# EAGLE board Transponder (EAGLE 9.5.1)
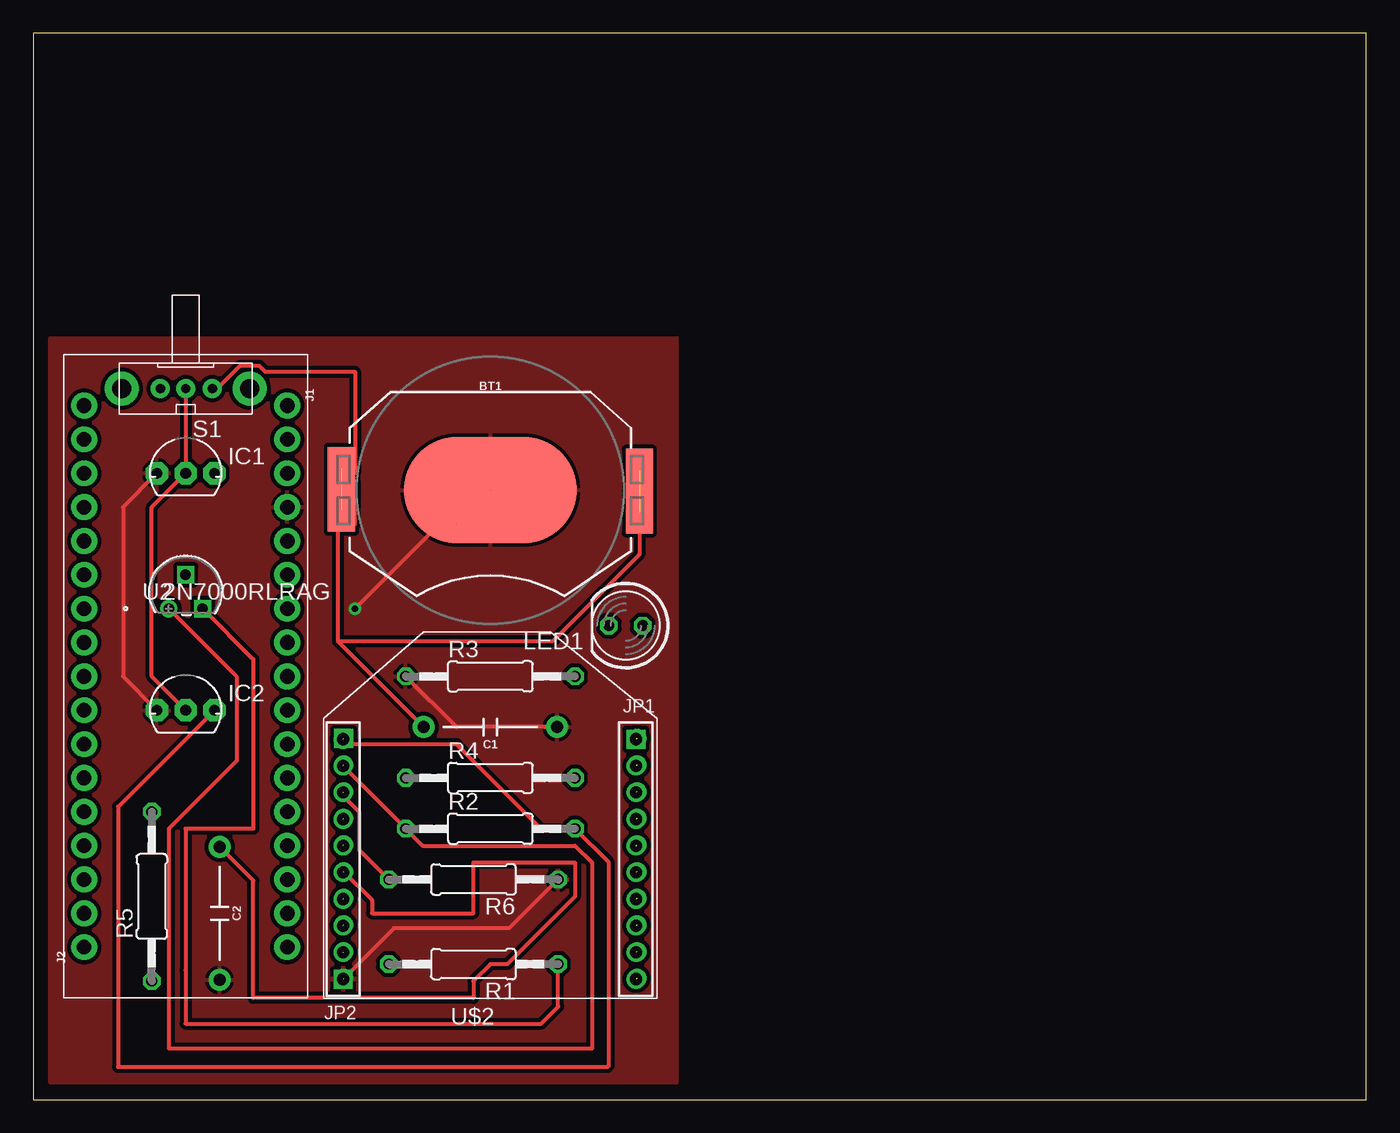
[diagram p0: board, top side]
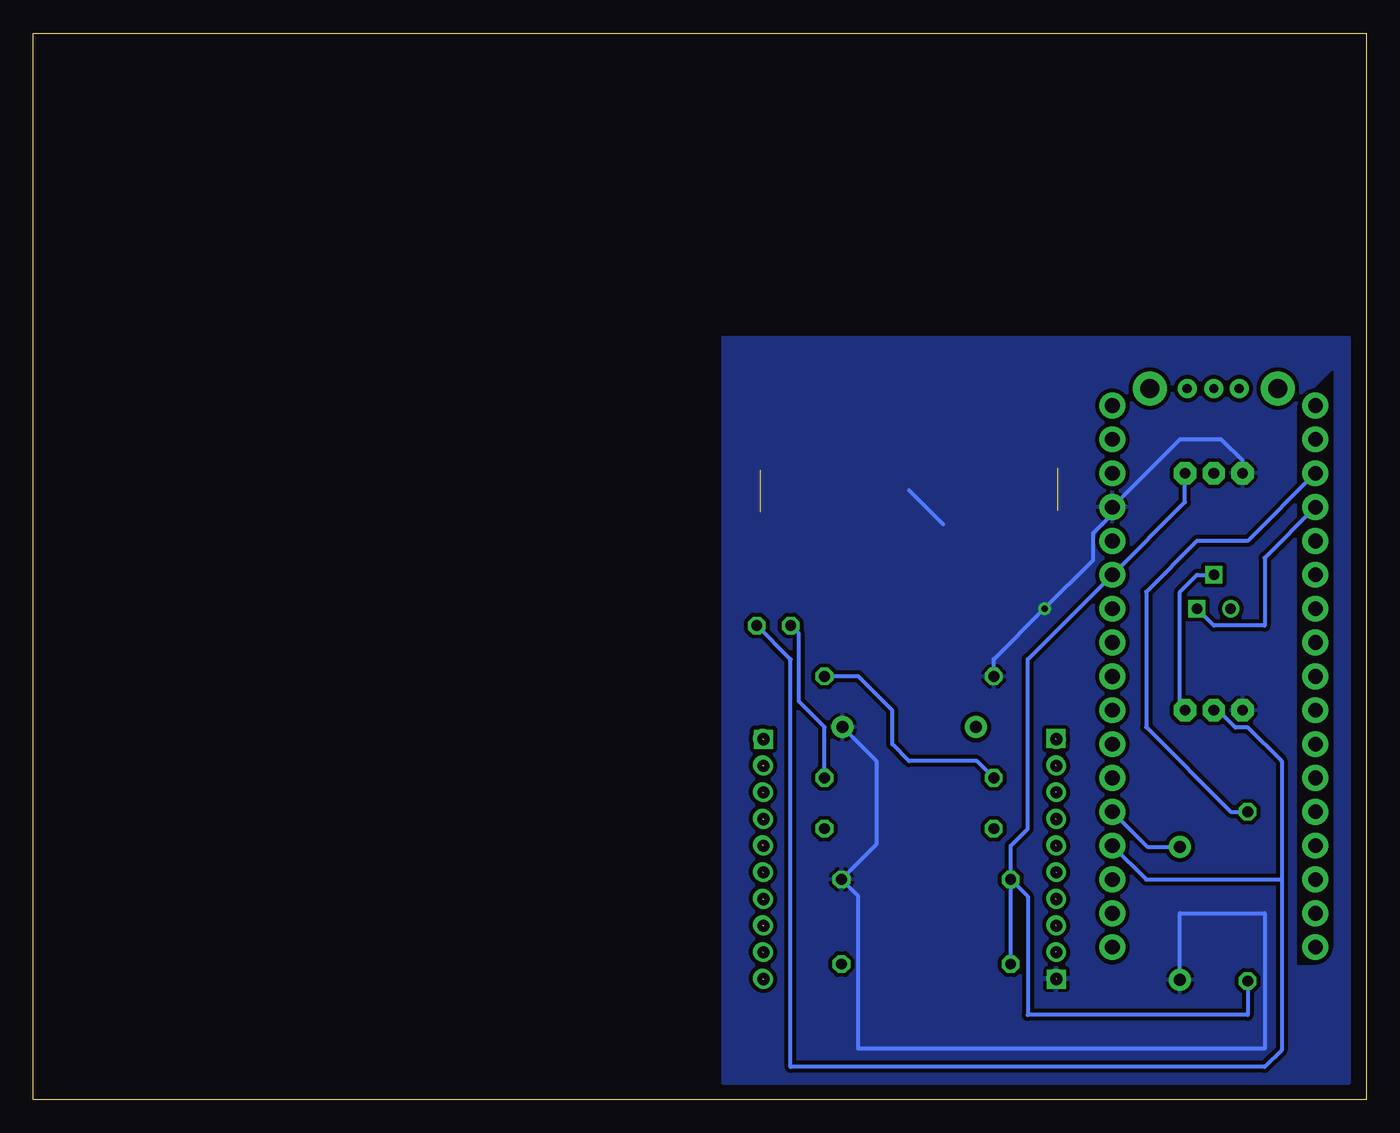
[diagram p1: board, bottom side, seen from below]

Size 100 x 80 mm. Coordinates in mm from the lower left corner, seen from the top.
Outline: 0,0 100,0 100,80 0,80 0,0
Copper layers (1*16): Top 0.035mm / dielectric 1.5mm / Bottom 0.035mm
Design rules "default *": minimum track width 12mil, minimum drill 20mil, track to track 12mil, track to pad 12mil, pad to pad 12mil, via to via 12mil, smd to smd 12mil, copper to edge 40mil, drill to drill 12mil, minimum pad ring 10mil, minimum via ring 8mil, stop-mask expansion 4mil, vias tented up to drill 0mil, thermal gap 10mil
Net classes: 0 default: clearance 0.205 mm
bRestrict: area 2.5,10.2 to 5.1,54.6
vRestrict: area 2.5,8.9 to 5.1,54.6; area 17.8,7.6 to 25.4,53.3; area 43.2,7.6 to 47,27.9

## Footprints (pad centres in the part's own frame; a part is rotated, then mirrored left to right if it is on the bottom)
BATTCON_20MM_4LEGS = smd 13 x 8: NEGATIVE 0,0 | smd 2.032 x 3.175: POSITIVE@1 -11.176,1.651; POSITIVE@2 -11.176,-1.524; POSITIVE@3 11.176,1.524; POSITIVE@4 11.176,-1.651
CAP-PTH-10MM = drill 0.9 pad 1.651: 1 -5,0; 2 5,0
TO92-INLINE = drill 0.813 pad 1.676 octagon: 1 -2.159,0; 2 0,0; 3 2.159,0
1X17_NO_SILK = drill 1.016 pad 1.88: 1 0,0; 2 2.54,0; 3 5.08,0; 4 7.62,0; 5 10.16,0; 6 12.7,0; 7 15.24,0; 8 17.78,0; 9 20.32,0; 10 22.86,0; 11 25.4,0; 12 27.94,0; 13 30.48,0; 14 33.02,0; 15 35.56,0; 16 38.1,0; 17 40.64,0
1X10M = drill 0.914 square: 1 -9,0 | drill 0.914: 2 -7,0; 3 -5,0; 4 -3,0; 5 -1,0; 6 1,0; 7 3,0; 8 5,0; 9 7,0; 10 9,0
LED5MM = drill 0.813 octagon: A -1.27,0; K 1.27,0
0207/12 = drill 0.813 octagon: 1 -6.35,0; 2 6.35,0
EG1213 = drill 0.7 pad 1.422: 1 -2,0; 2 0,0; 3 1.9,0 | drill 1.4 pad 2.54: MT1 -4.8,0; MT2 4.8,0
TO-92 = drill 0.787 pad 1.295: 1 -2.54,-2.54 | drill 0.787 pad 1.295 square: 2 -1.27,0; 3 0,-2.54
ARDUINOMICRO = drill 1.1 pad 1.93: P$1 -20.32,7.62; P$2 -17.78,7.62; P$3 -15.24,7.62; P$4 -12.7,7.62; P$5 -10.16,7.62; P$6 -7.62,7.62; P$7 -5.08,7.62; P$8 -2.54,7.62; P$9 0,7.62; P$10 2.54,7.62; P$11 5.08,7.62; P$12 12.7,-7.62; P$13 10.16,-7.62; P$14 12.7,7.62; P$15 15.24,7.62; P$16 17.78,7.62; P$17 20.32,7.62; P$18 20.32,-7.62; P$19 17.78,-7.62; P$20 15.24,-7.62; P$21 7.62,7.62; P$22 10.16,7.62; P$23 7.62,-7.62; P$24 5.08,-7.62; P$25 2.54,-7.62; P$26 0,-7.62; P$27 -2.54,-7.62; P$28 -5.08,-7.62; P$29 -7.62,-7.62; P$30 -10.16,-7.62; P$31 -12.7,-7.62; P$32 -15.24,-7.62; P$33 -17.78,-7.62; P$34 -20.32,-7.62
XBEE = drill 0.7 pad 1.422 square: 1 -11,5.5 | drill 0.7 pad 1.422: 2 -11,3.5; 3 -11,1.5; 4 -11,-0.5; 5 -11,-2.5; 6 -11,-4.5; 7 -11,-6.5; 8 -11,-8.5; 9 -11,-10.5; 10 -11,-12.5; 11 11,-12.5; 12 11,-10.5; 13 11,-8.5; 14 11,-6.5; 15 11,-4.5; 16 11,-2.5; 17 11,-0.5; 18 11,1.5; 19 11,3.5; 20 11,5.5

## Placement (x,y rotation side)
BT1  3.0  [BATTCON_20MM_4LEGS]  34.29,45.72 0 top
C1  10nF  [CAP-PTH-10MM]  34.29,27.94 180 top
C2  10nF  [CAP-PTH-10MM]  13.97,13.97 270 top
FRAME1  FRAME-LETTERNO_PACKAGE  [DUMMY]  -69.85,85.09 0 top  (outside the outline)
IC1  MCP1700-5002E/TO-ND  [TO92-INLINE]  11.43,46.99 0 top
IC2  MCP1700-3302E/TO-ND  [TO92-INLINE]  11.43,29.21 0 top
J1  ARD_H1  [1X17_NO_SILK]  19.05,52.07 270 top
J2  ARD_H2  [1X17_NO_SILK]  3.81,11.43 90 top
JP1  XBEE_H2  [1X10M]  45.21,18.03 270 top
JP2  XBEE_H1  [1X10M]  23.24,18.03 90 top
LED1  POWERLED  [LED5MM]  44.45,35.56 180 top
R1  10k  [0207/12]  33.02,10.16 180 top
R2  10k  [0207/12]  34.29,20.32 0 top
R3  47k  [0207/12]  34.29,31.75 0 top
R4  10k  [0207/12]  34.29,24.13 0 top
R5  4.7k  [0207/12]  8.89,15.24 90 top
R6  10k  [0207/12]  33.02,16.51 180 top
S1  EG1213  [EG1213]  11.43,53.34 180 top
U2  2N7000RLRAG  [TO-92]  12.7,39.37 0 top
U$1  ARDUINOMICRO  [ARDUINOMICRO]  11.43,31.75 90 top
U$2  XBEE  [XBEE]  34.29,21.59 0 top

## Library data of the parts
BT1 = SparkFun-Batteries; PROD_ID: BATT-10373; SF_SKU: PRT-11892
C1 C2 = SparkFun-Capacitors; PROD_ID: CAP-09321
FRAME1 = SparkFun-Aesthetics; DESIGNER: Lesley Wheat; VERSION: v01
IC1 IC2 S1 U$1 U$2 = adafruit
J1 J2 = SparkFun-Connectors
JP1 JP2 = pinhead-2
LED1 = led
R1-R6 = resistor
U2 = 2N7000RLRAG; BUILT_BY: EMA_UL_Team; MANUFACTURER_PART_NUMBER: 2N7000RLRAG; VENDOR: ON Semiconductor

## Nets
3.3V: IC2.3 JP2.10 R2.2 U2.2 U$2.1
5V: IC1.3 J1.6 R1.2 U$1.P$23
DIN: JP2.8 R5.1 R6.2 U$2.3
DOUT: JP2.9 R2.1 U2.1 U$2.2
GND: BT1.NEGATIVE C1.1 C2.2 IC1.1 IC2.1 J1.4 JP2.1 R3.1 R6.1 U$1.P$12 U$2.10
N$1: BT1.POSITIVE@1 BT1.POSITIVE@2 BT1.POSITIVE@3 BT1.POSITIVE@4 C1.2 S1.1
N$2: JP2.3 U$2.8
N$4: LED1.K R4.2
N$5: R3.2 R4.1
N$6: J1.17 U$1.P$34
N$7: J1.15 U$1.P$32
N$9: J1.12 U$1.P$29
N$10: J1.11 U$1.P$28
N$11: J1.9 U$1.P$26
N$12: J1.10 U$1.P$27
N$13: J1.8 U$1.P$25
N$14: J1.7 U$1.P$24
N$15: J1.5 U$1.P$13
N$16: J1.3 U$1.P$20
N$17: J1.2 U$1.P$19
N$18: J1.1 U$1.P$18
N$19: J2.17 U$1.P$17
N$20: J2.16 U$1.P$16
N$21: J2.13 U$1.P$22
N$22: J2.12 U$1.P$21
N$23: J2.11 U$1.P$11
N$24: J2.10 U$1.P$10
N$25: J2.9 U$1.P$9
N$26: J2.7 U$1.P$7
N$28: J2.8 U$1.P$8
N$29: JP1.1 U$2.20
N$30: J2.6 U$1.P$6
N$31: J2.5 U$1.P$5
N$32: J2.4 U$1.P$4
N$33: J2.3 U$1.P$3
N$34: J2.2 U$1.P$2
N$35: J2.1 U$1.P$1
N$36: J1.16 U$1.P$33
N$37: JP1.2 U$2.19
N$38: JP1.3 U$2.18
N$39: JP1.4 U$2.17
N$40: JP1.5 U$2.16
N$41: JP1.6 U$2.15
N$42: JP1.7 U$2.14
N$43: JP1.8 U$2.13
N$44: JP1.9 U$2.12
N$45: JP1.10 U$2.11
N$46: JP2.2 U$2.9
N$47: JP2.4 U$2.7
N$49: JP2.6 U$2.5
N$50: JP2.7 U$2.4
RSSI: C2.1 J1.13 JP2.5 U$1.P$30 U$2.6
RXA: J2.14 R1.1 U2.3 U$1.P$14
TXA: J2.15 R5.2 U$1.P$15
V_BATT: IC1.2 IC2.2 J1.14 LED1.A S1.2 U$1.P$31

## Tracks (layer width: path | path; a pad name or v marks a point on that pad's centre or on a via)
3.3V  (1 unrouted)
  Top 0.305: JP2.10 23.62,26.66 31.76,26.66 38.1,20.32 R2.2 43.18,17.78 43.18,2.54 43.08,2.44 6.35,2.44 6.35,21.97 IC2.3
  Bottom 0.305: IC2.3 13.97,29.59 13.97,38.1 12.7,39.37 U2.2
5V
  Bottom 0.305: IC1.3 13.59,44.83 J1.6 25.4,33.02 25.4,20.32 26.67,19.05 R1.2
DIN  (1 unrouted)
  Top 0.305: R6.2 24.46,18.72 24.46,21.57 23.24,22.79 JP2.8
  Bottom 0.305: R5.1 8.89,6.35 25.4,6.35 25.4,15.24 R6.2
DOUT  (1 unrouted)
  Top 0.305: JP2.9 27.94,20.34 R2.1 29.21,19.05 40.64,19.05 41.91,17.78 41.91,3.81 10.16,3.81 10.16,20.32 15.24,25.4 15.24,31.75 U2.1
GND  (via drill 0.51)  (3 unrouted)
  Top 0.305: IC1.1 6.73,44.45 6.73,31.75 IC2.1 | R6.1 35.7,12.84 27.05,12.84 JP2.1 23.18,8.97 | v24.13,36.83 30.48,43.18 31.75,43.18 | C1.1 31.75,27.94 R3.1
  Bottom 0.305: IC1.1 9.27,47.93 10.89,49.55 13.95,49.55 J1.4 19.05,43.92 20.47,42.5 20.47,40.49 v24.13,36.83 27.94,33.02 R3.1 | C1.1 36.75,25.4 36.75,19.13 R6.1 38.1,15.24 38.1,3.81 7.62,3.81 7.62,13.97 13.97,13.97 C2.2 | 31.75,43.18 BT1.NEGATIVE
  pour Top: 1.27,1.27 1.27,57.15 48.26,57.15 48.26,1.27
  pour Bottom: 1.27,1.27 1.27,57.15 48.26,57.15 48.26,1.27
N$1  (2 unrouted)
  Top 0.305: S1.1 13.79,53.34 15.52,55.07 16.95,55.07 17.4,54.61 24.13,54.61 24.13,46.99 22.86,45.72 22.86,43.18 | 22.86,43.18 24.13,43.18 24.13,46.35 BT1.POSITIVE@1 | C1.2 22.86,34.37 | 22.86,34.37 22.86,43.18 | BT1.POSITIVE@3 45.47,40.89 38.94,34.37 22.86,34.37
N$2  (1 unrouted)
N$4
  Bottom 0.305: R4.2 40.64,27.94 42.57,29.87 42.57,34.95 LED1.K
N$5
  Bottom 0.305: R4.1 29.21,25.4 34.29,25.4 35.56,26.67 35.56,29.21 38.1,31.75 R3.2
N$29  (1 unrouted)
N$37  (1 unrouted)
N$38  (1 unrouted)
N$39  (1 unrouted)
N$40  (1 unrouted)
N$41  (1 unrouted)
N$42  (1 unrouted)
N$43  (1 unrouted)
N$44  (1 unrouted)
N$45  (1 unrouted)
N$46  (1 unrouted)
N$47  (1 unrouted)
N$49  (1 unrouted)
N$50  (1 unrouted)
RSSI  (1 unrouted)
  Top 0.305: U$2.6 25.4,14.98 25.4,13.97 33.02,13.97 33.02,17.78 40.64,17.78 40.64,15.24 35.56,10.16 34.29,10.16 33.02,8.89 33.02,7.62 16.51,7.62 16.51,16.43 C2.1
  Bottom 0.305: U$1.P$30 16.43,18.97 C2.1
RXA
  Top 0.305: R1.1 39.37,6.96 38.1,5.69 11.43,5.69 11.43,9.7 11.42,9.71 11.42,20.32 16.51,20.32 16.51,33.02 U2.3
  Bottom 0.305: J2.14 7.62,40.64 7.62,35.56 11.43,35.56 U2.3
TXA
  Bottom 0.305: J2.15 8.89,41.91 12.7,41.91 16.51,38.1 16.51,27.94 10.16,21.59 R5.2
V_BATT
  Top 0.305: S1.2 IC1.2 8.89,44.45 8.89,31.75 IC2.2
  Bottom 0.305: J1.14 16.51,16.51 6.35,16.51 | 6.35,16.51 6.35,25.4 8.87,27.91 9.81,27.91 11.1,29.21 IC2.2 | 6.35,16.51 6.35,3.71 7.62,2.44 43.18,2.44 43.18,33.02 LED1.A